# Altium PCB robotShield.PcbDoc
Units mm, origin at the board's own origin, x right, y up, seen from the top; angles counter-clockwise.
Board outline 80.01 x 60.02 mm, 2 copper layers (Top Layer, Bottom Layer); 36 components, 22 nets, 132 pads, 34 vias.
Unrouted connection lines stored in the file: 1.
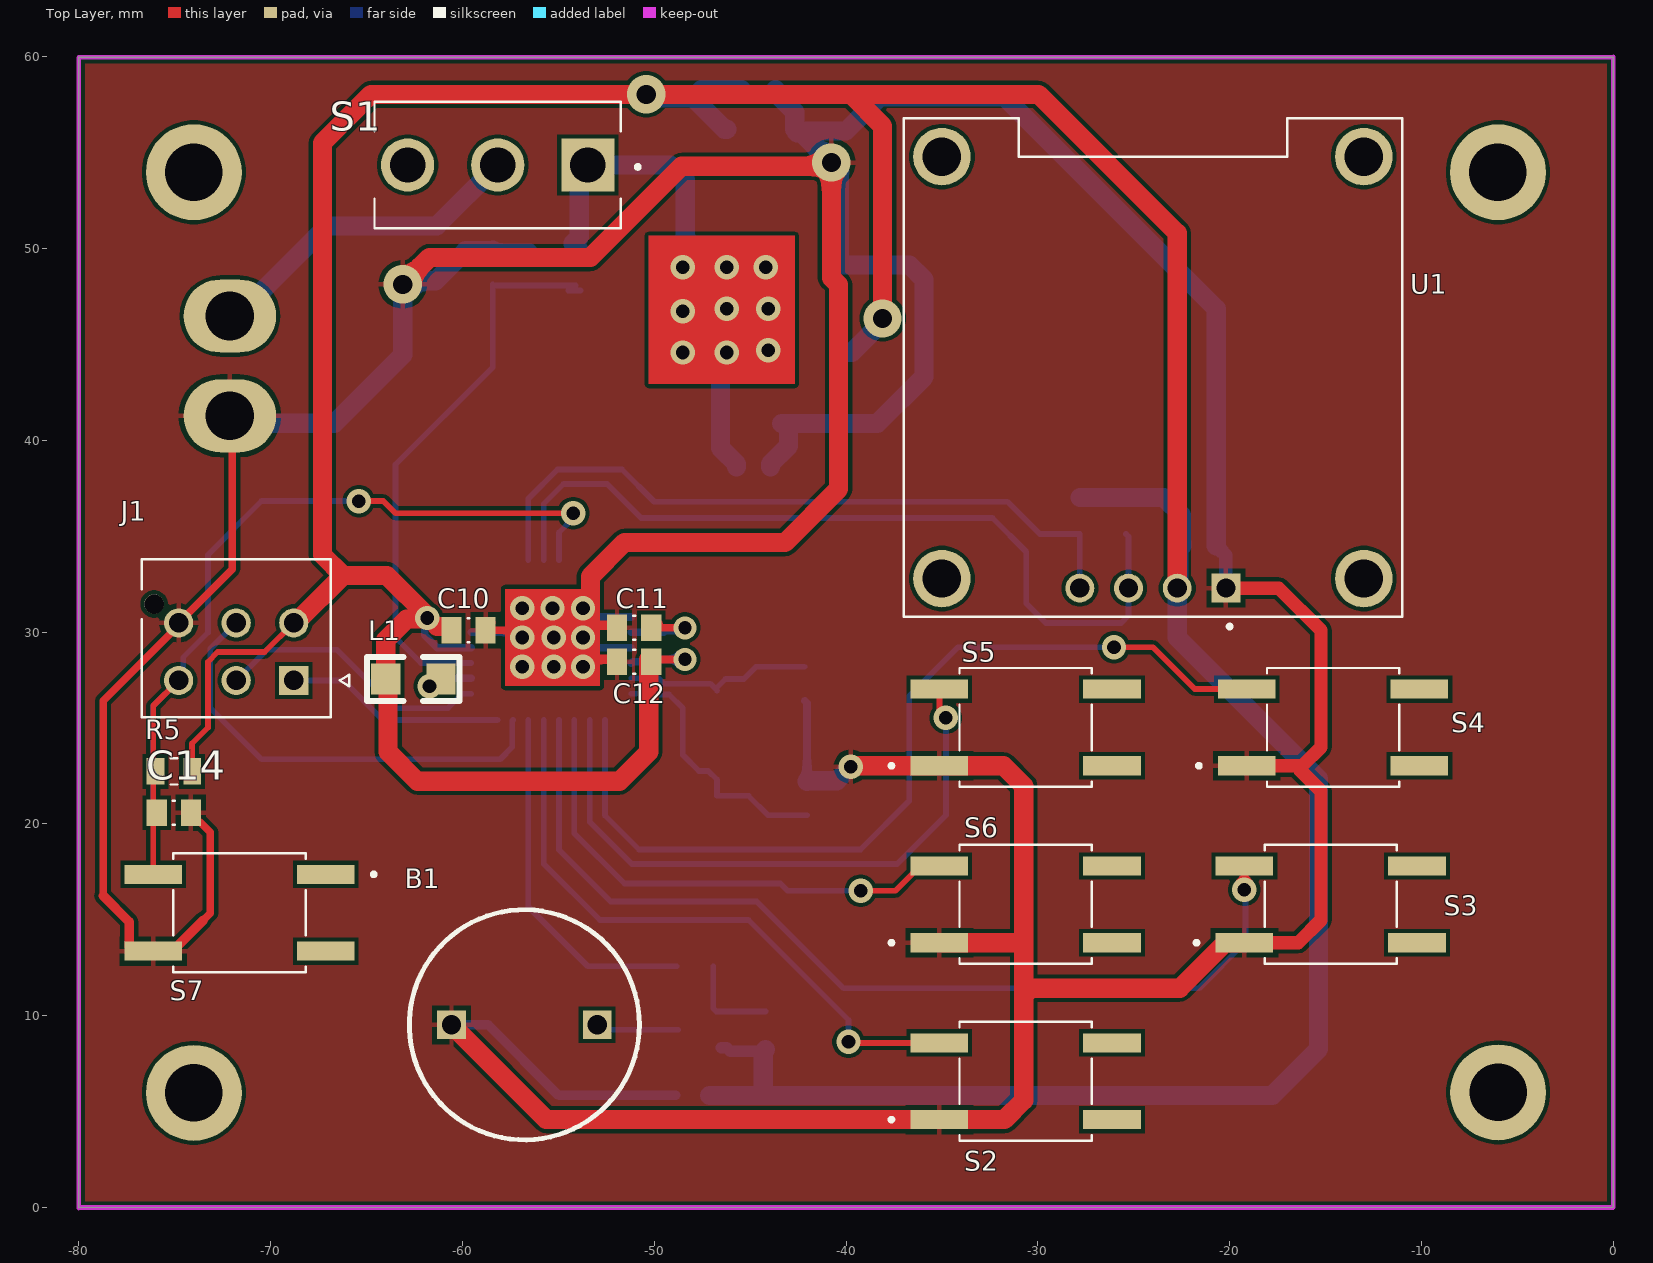
[diagram p0: Top Layer view]
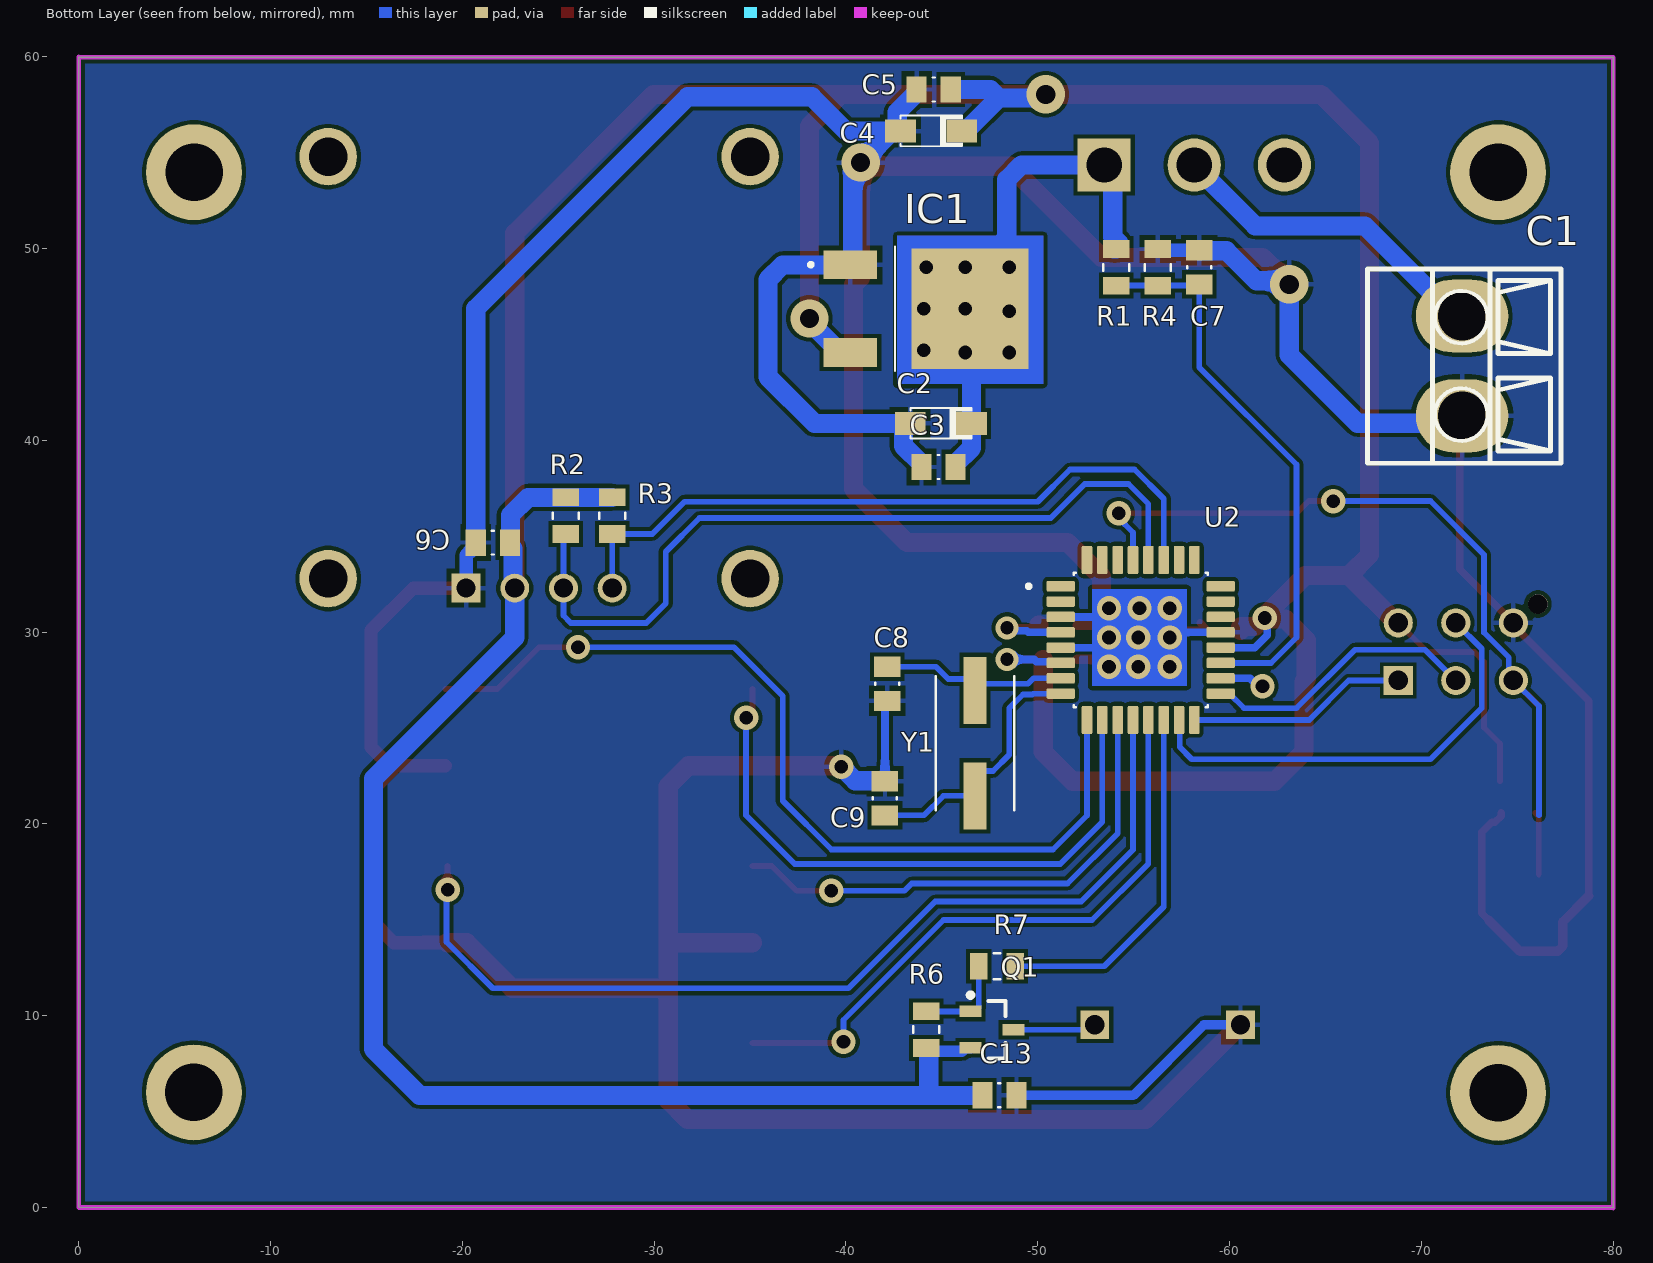
[diagram p1: Bottom Layer view, seen from below]
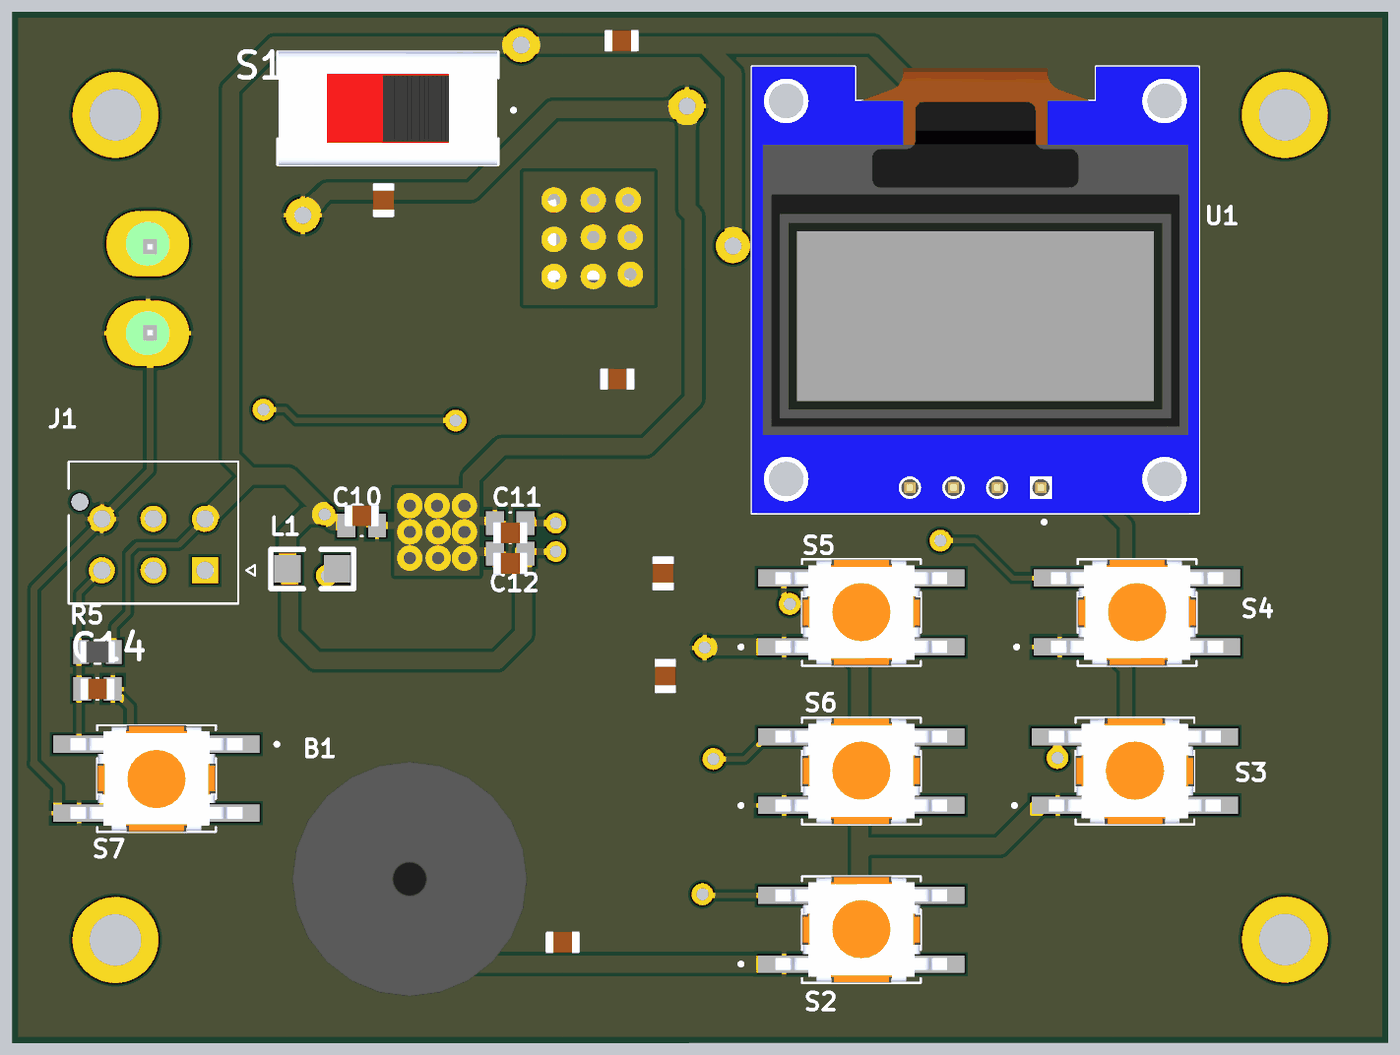
[diagram p2: 3D render of the assembled board from above, using the file's embedded part models]
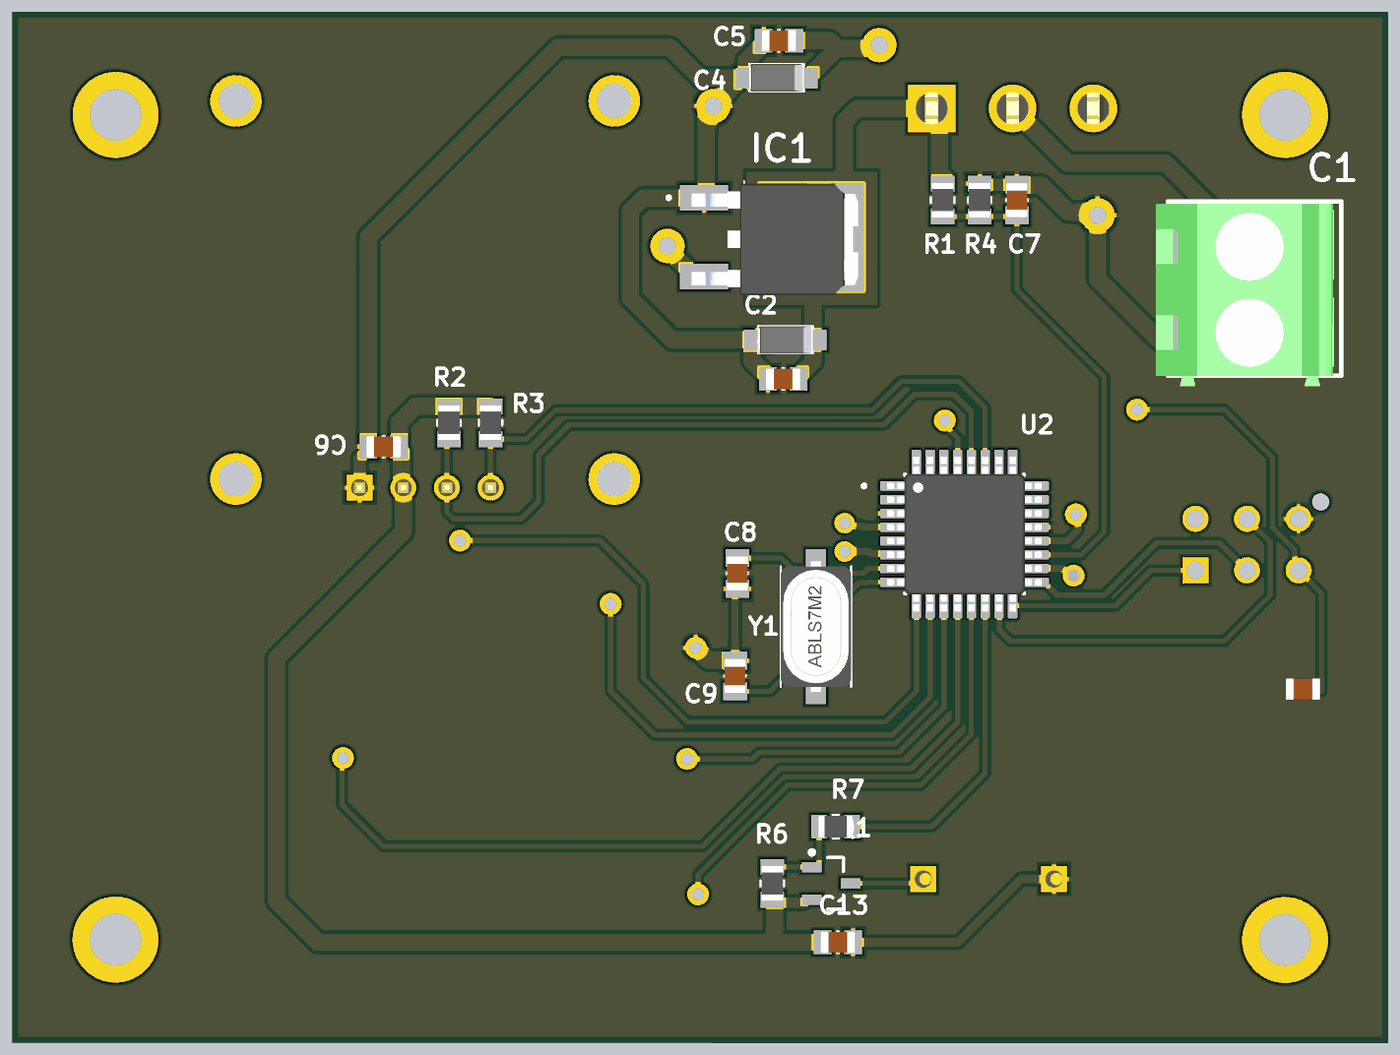
[diagram p3: 3D render of the assembled board from below, using the file's embedded part models]

## Layer stack, top to bottom
Top Solder: solder mask 0.0102, Solder Resist, Dk 3.5
Top Layer: signal copper 0.0356
Dielectric 1: dielectric 0.32, FR-4, Dk 4.8
Bottom Layer: signal copper 0.0356
Bottom Solder: solder mask 0.0102, Solder Resist, Dk 3.5

## Board outline
-80.012,-0.024 -80.012,59.976 -0.012,59.976 0,60 0,0

## Design rules (kind name [scope] priority, off if disabled: settings)
Clearance [All] p1: gap=0.2 ignorepadtopadclearanceinfootprint=FALSE
PolygonConnect [All] p1: connectstyle=Relief reliefconductorwidth=0.254 reliefentries=4 polygonreliefangle="90 Angle" airgapwidth=0.254
RoutingVias [All] p1: holewidth=0.711 width=1.27 viastyle="Through Hole" minholewidth=0.711 minwidth=1.27 maxholewidth=0.711 maxwidth=1.27
SolderMaskExpansion [All] p1: expansion=0.102 istentingtop=FALSE
Width [All] p1: maxlimit=1 minlimit=0.254 preferedwidth=0.254 minimp=50.000000 maximp=50.000000 favimp=50.000000
Width gnd [InNet('GND')] p2: maxlimit=1 minlimit=0.254 preferedwidth=1 minimp=50.000000 maximp=50.000000 favimp=50.000000
Width power [InNet('+3V3')] p3: maxlimit=1 minlimit=0.254 preferedwidth=1 minimp=50.000000 maximp=50.000000 favimp=50.000000
30 further rules are at their usual default settings.

## Components (designator, comment, footprint, x,y, rotation, side; value= is the part's Value field where it differs from the comment)
B1 "Buzzer3.3V" Buzzer1 -56.779,9.525 r0 top
C1 "Battery" Phonix2 -72.263,43.942 r90 bottom
C2 "F930J107MAA" "Cap SMD Size A Tantalium" -44.958,40.894 r0 bottom value="100 uF"
C3 "100n" CAPC2012X135N -44.831,38.608 r0 bottom
C4 "F930J107MAA" "Cap SMD Size A Tantalium" -44.45,56.134 r0 bottom value="100 uF"
C5 "100n" CAPC2012X135N -44.577,58.293 r0 bottom
C6 "100n" CAPC2012X135N -21.59,34.671 r180 bottom
C7 "100n" CAPC2012X135N -58.42,49.022 r90 bottom
C8 "22p" CAPC2012X135N -42.164,27.306 r90 bottom
C9 "22p" CAPC2012X135N -42.037,21.336 r270 bottom
C10 "100n" CAPC2012X135N -59.689,30.099 r0 top
C11 "100n" CAPC2012X135N -51.054,30.226 r180 top
C12 "100n" CAPC2012X135N -51.054,28.448 r180 top
C13 "100n" CAPC2012X135N -48.006,5.842 r180 bottom
C14 "100n" CAPC2012X135N -75.057,20.574 r0 top
IC1 "AD1117- 3.3V" LD1086DT33TR -49.532,46.863 r270 bottom
J1 "Programmer" MOLEX_2068320602 -68.803,27.48 r0 top
L1 "470nH" 0805_WIDE -61.122,27.559 r180 top
Q1 "FDN360P" SOT-23_N -47.625,9.271 r180 bottom
R1 "8K2" RESC2012X60N -54.102,49.022 r90 bottom
R2 "1K" RESC2012X60N -25.4,36.068 r270 bottom
R3 "1K" RESC2012X60N -27.813,36.068 r90 bottom
R4 "1K" RESC2012X60N -56.261,49.022 r270 bottom
R5 "1K" RESC2012X60N -75.057,22.733 r180 top
R6 "10K" RESC2012X60N -44.196,9.271 r270 bottom
R7 "470R" RESC2012X60N -47.879,12.573 r0 bottom
S1 "500SSP1S1M2REA" SW_500SSP1S1M2REA -58.166,54.356 r180 top
S2 "Button" SW_TL6700AF160QG -30.637,6.58 r0 top
S3 "Button" SW_TL6700AF160QG -14.732,15.804 r0 top
S4 "Button" SW_TL6700AF160QG -14.605,25.027 r0 top
S5 "Button" SW_TL6700AF160QG -30.637,25.027 r0 top
S6 "Button" SW_TL6700AF160QG -30.637,15.804 r0 top
S7 "Button" SW_TL6700AF160QG -71.628,15.367 r180 top
U1 "DM-OLED096-636" MODULE_DM-OLED096-636 -24.005,43.791 r180 top
U2 "ATMEGA328P-AU" QFP80P900X900X120-32N -55.372,29.591 r180 bottom
Y1 "16MHz" XTAL_ABLS7M2-25.000MHZ-D-2Y-T -46.734,24.211 r90 bottom

## Footprints (in the part's own frame and the unit in brackets; to place one, negate y for a bottom-side part, rotate by r counter-clockwise, add the part's x,y. Pads: shape width x height; smd on the part's side, far side on the other; paste and mask are expansions set on the pad)
0805_WIDE [mm]
  rect 1.524x1.6 smd: 1(0,0) 2(2.886,0)
  silkscreen extent -0.97,-1.14 3.86,1.14
Buzzer1 [mm]
  rect 1.5x1.5 hole 1: 1(3.8,0) 2(-3.8,0)
  silkscreen extent -6,-6 6,6, body extent -6.97,-6.85 6.72,6.85, height 7.59
"Cap SMD Size A Tantalium" [mm]
  rect 1.6x1.2 smd: 1(-1.595,0.011) 2(1.605,0.011)
  silkscreen extent -1.65,-0.8 1.6,0.81, body extent -1.59,-0.8 1.61,0.8, height 1.6
CAPC2012X135N [mm]
  rect 1.05x1.38 smd: 1(-0.89,0) 2(0.89,0)
  silkscreen extent -0.05,-0.63 0.05,0.63, body extent -1,-0.63 1,0.63, height 0.72
LD1086DT33TR [mm]
  rect 1.5x2.8 smd: 1(-2.286,-9.3) 3(2.286,-9.3)
  rect 6.3x6.1 smd: 2(0,-3.05)
  silkscreen extent -3.25,-11.46 3.25,-6.98, body extent -3.12,-10.07 3.38,-0.34, height 2.4
MODULE_DM-OLED096-636 [mm]
  rect 1.508x1.508 / inner round 1.508 / far side rect 1.508x1.508 hole 1: 1(-3.81,11.5)
  round 1.508 hole 1: 2(-1.27,11.5) 3(1.27,11.5) 4(3.81,11.5)
  round 3 hole 2: S1(-11,11) S2(11,11) S3(11,-11) S4(-11,-11)
  silkscreen extent -13,-13 13,13.6, body extent -13,-13 13,13, height 5.66
MOLEX_2068320602 [mm]
  rect 1.52x1.52 / inner round 1.52 / far side rect 1.52x1.52 hole 1.02 mask+0.076: 1(0,0)
  round 1.52 hole 1.02 mask+0.076: 2(-3,0) 3(-6,0) 4(0,3) 5(-3,3) 6(-6,3)
  round 1.02 hole 1.02 unplated mask+0.076: ""(-7.28,3.98)
  silkscreen extent -7.93,-1.93 2.9,6.33
Phonix2 [mil]
  oval 150x190 hole 100: 1(-105,5) *(100,5)
  silkscreen extent -202,-198 197,200, body extent -226,-179 191,227, height 559
QFP80P900X900X120-32N [mm]
  rrect25% 1.47x0.55 smd: 1(-4.17,2.8) 2(-4.17,2) 3(-4.17,1.2) 4(-4.17,0.4) 5(-4.17,-0.4) 6(-4.17,-1.2) 7(-4.17,-2) 8(-4.17,-2.8) 17(4.17,-2.8) 18(4.17,-2) 19(4.17,-1.2) 20(4.17,-0.4) 21(4.17,0.4) 22(4.17,1.2) 23(4.17,2) 24(4.17,2.8)
  rrect25% 0.55x1.47 smd: 9(-2.8,-4.17) 10(-2,-4.17) 11(-1.2,-4.17) 12(-0.4,-4.17) 13(0.4,-4.17) 14(1.2,-4.17) 15(2,-4.17) 16(2.8,-4.17) 25(2.8,4.17) 26(2,4.17) 27(1.2,4.17) 28(0.4,4.17) 29(-0.4,4.17) 30(-1.2,4.17) 31(-2,4.17) 32(-2.8,4.17)
  silkscreen extent -5.94,-3.5 3.5,3.5, body extent -4.5,-4.5 4.5,4.5, height 1.2
RESC2012X60N [mm]
  rect 0.92x1.38 smd: 1(-0.955,0) 2(0.955,0)
  silkscreen extent -0.17,-0.68 0.17,0.68, body extent -1,-0.63 1,0.63, height 0.6
SOT-23_N [mm]
  rect 1.15x0.6 smd: 1(-1.125,0.95) 2(-1.125,-0.95) 3(1.125,0)
  silkscreen extent -1.25,-1.5 0.7,1.92, body extent -0.7,-1.5 0.7,1.5, height 1.1
SW_500SSP1S1M2REA [mm]
  rect 2.775x2.775 / inner round 2.775 / far side rect 2.775x2.775 hole 1.85: 1(-4.7,0)
  round 2.775 hole 1.85: 2(0,0) 3(4.7,0)
  silkscreen extent -7.4,-3.3 6.43,3.3, body extent -6.35,-3.3 6.35,3.3, height 12.93
SW_TL6700AF160QG [mm]
  rect 3x1 smd: 1(-4.5,-2) 2(4.5,-2) 3(-4.5,2) 4(4.5,2)
  silkscreen extent -7.1,-3.1 3.45,3.1, body extent -5,-3.1 5,3.1, height 3.5
XTAL_ABLS7M2-25.000MHZ-D-2Y-T [mm]
  rect 3.5x1.2 smd: 1(-2.75,0) 2(2.75,0)
  silkscreen extent -3.5,-2.05 3.5,2.05, body extent -3.8,-2.05 3.8,2.05, height 1.9

## Part data
B1: library part Buzzer, "Buzzer 5V", ComponentLink1Description="Manufacturer Link", ComponentLink1URL=http://www.megastar.com/linecard/buzzmode/index.php, DatasheetVersion=17-Dec-2003, LatestRevisionDate=17-Dec-2003, LatestRevisionNote="Schematic revised, PCB Footprint replaced.", PackageDescription="Magnetic Transducer Buzzer", PackageReference=ABSM-1574, Published=24-Mar-1999, Publisher="Altium Limited", Sup1=Javan, UnitPrice=5250
C1: library part Phonix2
C2 C4: library part Capacitor, "CAP TANT 100UF 6.3V 20% 1206", Link=https://www.digikey.com/products/en/capacitors/tantalum-capacitors/59?k=CAP+TANT+100U&k=&pkeyword=CAP+TANT+100U&pv13=67&pv987=1&FV=ffe0003b&mnonly=0&newproducts=0&ColumnSort=0&page=1&quantity=0&ptm=0&fid=0&pageSize=25, Price=0.18
C3 C5 C6 C7 C8 C9 C10 C11 C12 C13 C14: library part GRM21BR61A106KE19K, "SMD Capacitor X5R(EIA) with Capacitance: 10uF Tol. 10%. Rated Voltage: 10Vdc", Package="0805 Murata", Check_prices=https://www.snapeda.com/parts/GRM21BR61A106KE19K/Murata+Electronics+North+America/view-part/?ref=eda, MF=Murata, MP=GRM21BR61A106KE19K, SnapEDA_Link=https://www.snapeda.com/parts/GRM21BR61A106KE19K/Murata+Electronics+North+America/view-part/?ref=snap
IC1: library part LD1086DT33TR, "Linear Voltage Regulator IC Positive Fixed 1 Output 1.5A DPAK", Package="TO-252 STMicroelectronics", Check_prices=https://www.snapeda.com/parts/LD1086DT33TR/STMicroelectronics/view-part/?ref=eda, MF=STMicroelectronics, MP=LD1086DT33TR, SnapEDA_Link=https://www.snapeda.com/parts/LD1086DT33TR/STMicroelectronics/view-part/?ref=snap
J1: library part 2068320602, Package=None, Availability=Unavailable, MP=2068320602, Price=None
L1: library part Self
Q1: library part MOSFET-P, "P-Channel MOSFET", LatestRevisionDate=17-Jul-2002, LatestRevisionNote="Re-released for DXP Platform.", PackageDescription="TO, Flat Index; 3 In-Line, Axial Leads; Body Dia. 4.6mm; Lead Dia. 0.5 mm (max)", PackageReference=E3, PackageVersion=1995/1996, Published=8-Jun-2000, Publisher="Altium Limited"
R1 R2 R3 R4 R5 R6 R7: library part RC0805FR-07910RL, "910 Ohms Â±1% 0.125W, 1/8W Chip Resistor 0805 (2012 Metric) Moisture Resistant Thick Film", Package="2012 Rohm Semiconductor", Availability="In Stock", MF=Yageo, MP=RC0805FR-07910RL, Price=None, Purchase-URL=https://pricing.snapeda.com/search/part/RC0805FR-07910RL/?ref=eda
S1: "Slide Switch SPDT Through Hole  <a href=\"https://pricing.snapeda.com/parts/500SSP1S1M2REA/E-Switch/view-part?ref=eda\">Check availability</a> <a href=\"https://pricing.snapeda.com/parts/500SSP1S1M2REA/E-Switch/view-part?ref=eda\">Check availability</a>", Package=None, Availability=Unavailable, MP=500SSP1S1M2REA, Price=None
S2 S3 S4 S5 S6 S7: library part TL6700AF160QG, Package=None, Availability=Unavailable, MP=TL6700AF160QG, Price=None
U1: "0.96â€ 128 X 64 MONOCHROME GRAPHIC OLED DISPLAY MODULE - I2C", Package=Package, Check_prices=https://www.snapeda.com/parts/DM-OLED096-636/Display+Module/view-part/?ref=eda, MF="Display Module", MP=DM-OLED096-636, SnapEDA_Link=https://www.snapeda.com/parts/DM-OLED096-636/Display+Module/view-part/?ref=snap
U2: "AVR AVRÂ® ATmega Microcontroller IC 8-Bit 20MHz 32KB (16K x 16) FLASH 32-TQFP (7x7)", Package="TQFP-32 Microchip", Check_prices=https://www.snapeda.com/parts/ATMEGA328P-AU/Microchip/view-part/?ref=eda, MF="Microchip Technology", MP=ATMEGA328P-AU, SnapEDA_Link=https://www.snapeda.com/parts/ATMEGA328P-AU/Microchip/view-part/?ref=snap
Y1: library part ABLS7M2-25.000MHZ-D-2Y-T, "25 MHz Â±20ppm Crystal 18pF 60 Ohms 2-SMD, Flat Lead", Package=Package, Check_prices=https://www.snapeda.com/parts/ABLS7M2-25.000MHZ-D-2Y-T/Abracon+LLC/view-part/?ref=eda, MF="Abracon LLC", MP=ABLS7M2-25.000MHZ-D-2Y-T, SnapEDA_Link=https://www.snapeda.com/parts/ABLS7M2-25.000MHZ-D-2Y-T/Abracon+LLC/view-part/?ref=snap

## Free pads (board coordinates)
  round 5 hole 3: ""(-74.012,5.976) ""(-74.012,53.976) ""(-6.012,53.976) ""(-6,6)

## Via types
v1: diameter 1.27, hole 0.711, Top Layer to Bottom Layer, 28 vias
v2: diameter 2, hole 1, Top Layer to Bottom Layer, 4 vias
v3: diameter 1.2, hole 0.7, Top Layer to Bottom Layer, 2 vias

## Nets (pads, with @x,y where several pads share a name; then routed paths per layer and width w, separated by ;. In a path a pad name is that pad's centre, name@x,y a point inside that pad or via, vN(x,y) a via of type N, cw(c..) or ccw(c..) an arc to the next point about the centre after c; other vN are vias at no path point)
+3V3: C4.1 C5.1 C6.2 C10.1 C11.1 C12.1 C13.1 IC1.3 J1.4 L1.2 Q1.2 R2.1 R3.2 R5.1 R6.2 U1.2 U2.4 U2.6 U2.20 | length 249.9
  Top Layer w0.3: R5.1@-74.102,22.225 -74.102,24.196 -73.279,25.019 -73.279,28.448 -72.771,28.956 -70.327,28.956 J1.4
  Top Layer w0.4: C11.1 C11.1@-49.982,30.226 ; C12.1@-50.053,28.575 v3(-48.403,28.575) ; C11.1@-50.053,30.297 C11.1@-49.982,30.226 ; v3(-48.403,30.226) C11.1@-49.982,30.226
  Top Layer w1: J1.4 -68.707,30.48 -66.23,32.956 ; v1@-61.901,30.682 -62.917,30.682 -64.008,29.591 L1.2 -63.881,27.432 -63.881,23.749 -62.357,22.225 -51.816,22.225 -50.291,23.75 C12.1@-50.291,28.575 ; v1@-61.786,30.797 -63.946,32.956 -66.23,32.956 ; -61.331,30.289 -60.604,30.289 -60.579,30.264 C10.1 ; C11.1@-50.053,30.297 C11.1@-50.053,30.353 ; v2(-38.1,46.355) -38.1,56.388 -39.751,58.039 ; U1.2 -22.735,50.802 -29.972,58.039 -39.751,58.039 ; -66.23,32.956 -67.31,34.036 -67.31,55.499 -64.77,58.039 v2(-50.419,58.039) -39.751,58.039
  Bottom Layer w0.4: v1(-61.849,30.734) -61.976,30.607 -61.976,29.845 -61.322,29.191 U2.20 ; U2.6 -51.131,28.462 -49.942,28.462 -49.829,28.575 v3@-48.641,28.575 ; U2.4 -49.511,29.991 -49.429,30.073 -48.794,30.073 v3@-48.641,30.226
  Bottom Layer w0.6: Q1.2 -46.225,8.321 -46.054,8.15 -44.592,8.15 -44.586,8.156 -44.356,8.156 R6.2
  Bottom Layer w1: v2(-50.419,58.039) -50.228,57.848 -47.97,57.848 ; C13.1 -44.322,5.842 ; C4.1@-46.228,56.223 -46.345,56.223 -47.97,57.848 ; C5.1 -47.525,58.293 -47.97,57.848 ; R6.2@-44.196,8.236 -44.322,8.11 -44.322,5.842 ; IC1.3@-40.359,44.577 -39.709,44.577 -38.1,46.186 v2(-38.1,46.355) ; R3.2 R2.1 -23.434,37.023 -22.505,36.094 -22.505,34.696 C6.2 -22.48,34.506 -22.638,34.348 -22.638,32.389 U1.2 -22.735,29.72 -15.367,22.352 -15.367,8.255 -17.78,5.842 -44.322,5.842
GND: B1.2 C1.1 C2.2 C3.2 C4.2 C5.2 C6.1 C7.2 C8.1 C9.1 C10.2 C11.2 C12.2 C13.2 C14.2 IC1.1 J1.6 R4.1 S2.1 S3.1 S4.1 S5.1 S6.1 S7.4 U1.1 U2.3 U2.5 U2.21 | length 334.7
  Top Layer w0.4: -78.74,16.256 -78.74,26.416 -74.803,30.353 J1.6 -72.009,33.274 -72.009,40.64 C1.1@-72.263,40.894 ; C14.2 -74.167,20.409 -73.842,20.084 -73.677,20.084 -73.152,19.559 -73.152,15.343 -73.529,14.966 ; C10.2@-58.474,30.48 -58.799,30.155 C10.2 -57.277,30.099 v1(-56.896,29.718)
  Top Layer w0.5: -78.74,16.256 -77.378,14.894 -77.378,13.617 -77.128,13.367 S7.4 -75.128,13.367 -73.529,14.966 ; -54.229,30.48 -54.102,30.353 C11.2@-52.071,30.353 ; v1(-53.721,28.194) -53.34,28.575 C12.2@-52.071,28.575
  Top Layer w0.7: U1.1 -17.432,32.291 -15.24,30.099 -15.24,24.003 -16.216,23.027 S4.1 ; S3.1 -16.422,13.804 -15.24,14.986 -15.24,21.717 -16.383,22.86
  Top Layer w1: v2(-63.119,48.133) -61.722,49.53 -53.34,49.53 -48.578,54.292 -40.958,54.292 v2(-40.767,54.483) -40.767,48.48 -40.394,48.107 -40.394,37.457 -43.18,34.671 -51.562,34.671 -53.332,32.901 -53.332,31.631 v1(-53.721,31.242) ; B1.2 -55.634,4.58 S2.1 -31.742,4.58 -30.734,5.588 -30.734,11.049 ; v1(-39.751,22.987) -39.711,23.027 S5.1 -31.79,23.027 -30.734,21.971 -30.734,11.049 ; S6.1 -30.837,13.804 ; S3.1 -20.232,13.804 -22.606,11.43 -30.353,11.43 -30.734,11.049
  Bottom Layer w0.4: U2.21 -57.169,29.991 v1(-56.896,29.718) ; v1(-53.721,29.718) -53.194,29.191 U2.5 ; v1(-53.721,31.242) -53.27,30.791 U2.3 ; C8.1 -42.037,26.289 C9.1
  Bottom Layer w0.5: B1.2 -58.674,9.525 -54.991,5.842 C13.2
  Bottom Layer w0.7: C7.2 R4.1@-56.476,49.912 ; C6.1@-20.7,34.506 -20.195,34.001 U1.1
  Bottom Layer w1: C1.1@-72.263,40.894 -66.675,40.894 -63.119,44.45 v2(-63.119,48.133) -62.928,48.324 -61.404,48.324 -59.841,49.887 -58.445,49.887 C7.2 ; C3.2 -43.941,38.773 -43.006,39.708 -43.006,40.536 -43.053,40.583 -43.053,40.783 C2.2@-43.153,40.883 ; C5.2 -43.687,58.128 -42.677,57.118 C4.2@-42.677,56.223 ; C2.2 C2.2@-43.153,40.883 ; C9.1 -42.012,22.251 -40.487,22.251 v1(-39.751,22.987) ; C6.1@-20.7,34.506 C6.1 -20.7,46.862 -31.75,57.912 -38.227,57.912 -40.016,56.123 -42.645,56.123 -42.545,56.023 -42.307,56.023 v2(-40.767,54.483) -40.767,54.212 -40.359,53.804 -40.359,49.149 -36.703,49.149 -35.941,48.387 -35.941,43.307 -38.365,40.883 C2.2@-43.153,40.883
  other v1: -56.896,28.194 -55.245,28.194 -55.245,29.718 -56.896,31.242 -55.308,31.242
MIC_BUTTON1: S2.3 U2.13 | length 32.7
  Top Layer w0.3: v1(-39.878,8.636) -39.822,8.58 S2.3
  Bottom Layer w0.3: U2.13 -55.772,17.926 -52.832,14.986 -45.085,14.986 -39.878,9.779 v1(-39.878,8.636)
MIC_BUTTON2: S3.3 U2.12 | length 50.5
  Top Layer w0.3: S3.3 v1(-19.232,16.565) v1@-19.177,16.51
  Bottom Layer w0.3: U2.12 -54.972,18.65 -52.278,15.956 -44.658,15.956 -40.132,11.43 -21.59,11.43 -19.177,13.843 v1@-19.177,16.51
MIC_BUTTON3: S4.3 U2.9 | length 47.7
  Top Layer w0.3: v1(-26.035,29.21) -24.003,29.21 -21.82,27.027 S4.3
  Bottom Layer w0.3: U2.9 -52.572,20.441 -50.8,18.669 -39.243,18.669 -36.703,21.209 -36.703,26.67 -34.163,29.21 v1(-26.035,29.21)
MIC_BUTTON4: S5.3 U2.10 | length 32.7
  Top Layer w0.3: S5.3 -35.137,25.866 v1(-34.798,25.527)
  Bottom Layer w0.3: U2.10 -53.372,20.098 -51.181,17.907 -37.338,17.907 -34.798,20.447 v1@-34.798,25.654
MIC_BUTTON5: S6.3 U2.11 | length 26.7
  Top Layer w0.3: v1(-39.243,16.51) -37.431,16.51 -36.137,17.804 S6.3
  Bottom Layer w0.3: U2.11 -54.172,19.501 -51.562,16.891 -43.434,16.891 -43.053,16.51 v1(-39.243,16.51)
MIC_BUZZER_PWRON: R7.1 U2.14 | length 18.8
  Bottom Layer w0.3: U2.14 -56.572,15.678 -53.467,12.573 R7.1
MIC_SCL: R2.2 U1.3 U2.28 | length 42.9
  Bottom Layer w0.3: U2.28 -55.772,36.684 -54.737,37.719 -52.451,37.719 -50.688,35.956 -32.37,35.956 -30.607,34.193 -30.607,31.496 -29.591,30.48 -25.654,30.48 -25.27,30.864 -25.27,31.112 -25.275,31.117 U1.3 -25.275,34.988 R2.2
MIC_SDA: R3.1 U1.4 U2.27 | length 36.8
  Bottom Layer w0.3: U2.27 -56.572,36.957 -55.048,38.481 -51.689,38.481 -50.005,36.797 -31.59,36.797 -29.906,35.113 R3.1 -27.815,35.111 U1.4
MIC_VbattSamp: C7.1 R1.1 R4.2 U2.19 | length 30
  Bottom Layer w0.3: U2.19 -62.173,28.391 -63.5,29.718 -63.5,38.735 -58.42,43.815 C7.1 -58.355,48.067 R4.2 R1.1 ; R1.1@-54.483,47.813 R1.1@-53.848,47.813
MISO: J1.1 U2.16 | length 11.5
  Bottom Layer w0.3: J1.1 -66.215,27.48 -64.156,25.421 U2.16
MOSI: J1.5 U2.15 | length 23.6
  Bottom Layer w0.3: J1.5 -73.152,29.131 -73.152,26.035 -70.485,23.368 -58.039,23.368 -57.404,24.003 -57.404,25.389 U2.15
NetB1_1: B1.1 Q1.3 | length 4.3
  Bottom Layer w0.3: B1.1 -52.725,9.271 Q1.3
NetC1_2: C1.* S1.2 | length 17.5
  Bottom Layer w1: C1.*@-72.263,46.101 -72.136,46.101 -67.056,51.181 -61.341,51.181 S1.2
NetC2_1: C2.1 C3.1 IC1.2 R1.2 S1.1 | length 27.2
  Bottom Layer w1: R1.2@-54.229,50.254 -54.229,50.292 -53.912,50.609 -53.912,53.91 S1.1 -49.149,54.356 -48.387,53.594 -48.387,50.546 -47.625,49.784 -47.625,49.513 -46.753,48.641 IC1.2@-46.482,48.641 ; R1.2 R1.2@-53.952,49.977 ; v1(-46.228,49.022) -46.482,48.768 -46.228,48.514 v1(-46.228,46.863) -46.553,46.538 -46.553,44.902 v1(-46.228,44.577) -46.553,44.252 -46.553,39.605 -45.721,38.773 C3.1
  other v1: -48.514,44.577 -44.069,44.704 -48.514,46.736 -44.069,46.863 -48.514,49.022 -44.196,49.022
NetC8_2: C8.2 U2.7 Y1.2 | length 9.7
  Bottom Layer w0.3: U2.7 -49.778,27.591 -49.492,27.305 -47.078,27.305 Y1.2 ; Y1.2@-46.734,27.109 -46.284,27.559 -45.339,27.559 -44.702,28.196 C8.2
NetC9_2: C9.2 U2.8 Y1.1 | length 13.7
  Bottom Layer w0.3: U2.8 -49.761,26.791 -49.721,26.751 -49.23,26.751 -48.514,26.035 -48.514,23.608 -47.669,22.763 -47.184,22.763 -46.734,22.313 Y1.1 -45.083,21.461 -44.068,20.446 C9.2
NetL1_1: L1.1 U2.18 | length 2.4
  Bottom Layer w0.4: v1(-61.722,27.178) -61.487,27.178 -61.074,27.591 U2.18
NetQ1_1: Q1.1 R6.1 R7.2 | length 5
  Bottom Layer w0.3: R7.2 -46.924,10.371 -46.774,10.221 Q1.1 -44.201,10.221 R6.1
RESET: C14.1 J1.3 R5.2 S7.2 U2.29 | length 48.7
  Top Layer w0.3: S7.2 -76.128,20.393 C14.1 ; C14.1@-76.128,20.574 -76.128,26.155 J1.3 ; v1(-65.405,36.83) -64.135,36.83 -63.5,36.195 v1(-54.229,36.195)
  Bottom Layer w0.3: -76.139,20.447 -76.139,26.144 J1.3 -74.57,27.713 -74.57,28.681 -73.279,29.972 -73.279,34.036 -70.485,36.83 v1(-65.405,36.83) ; U2.29 -54.972,35.191 -54.229,35.934 v1(-54.229,36.195)
SCK: J1.2 U2.17 | length 14.5
  Bottom Layer w0.3: J1.2 -70.2,29.083 -66.548,29.083 -63.5,26.035 -60.758,26.035 -60.002,26.791 U2.17
pads on no net: J1. S1.3 S2.2 S2.4 S3.2 S3.4 S4.2 S4.4 S5.2 S5.4 S6.2 S6.4 S7.1 S7.3 U1.S1 U1.S2 U1.S3 U1.S4 U2.1 U2.2 U2.22 U2.23 U2.24 U2.25 U2.26 U2.30 U2.31 U2.32

## Polygon pours and split planes (outlines as drawn)
GND on Top Layer "GND_L01_P000" (solid, pour order 0): -80.01,59.944 0,59.944 0,0 -80.01,0
GND on Bottom Layer "GND_L02_P001" (solid, pour order 1): -80.01,59.944 -80.01,0 0,0 0,59.944

## Keep-outs
Keep-Out Layer:
  lines w0.254: -80.012,-0.024 -80.012,59.976 -0.012,59.976 ; -80,0 0,0 0,60

## Other copper
Top Layer:
  region net NetC2_1: -42.672,50.673 -50.292,50.673 -50.292,42.926 -42.672,42.926
  region net GND: -52.832,32.258 -57.785,32.258 -57.785,27.178 -52.832,27.178
Bottom Layer:
  rectangle net NetC2_1: -50.292,42.926 -42.672,50.673
  rectangle net GND: -57.785,27.178 -52.832,32.258